# Altium PCB ts-50s-digi-interface.PcbDoc
Units mm, origin at the board's own origin, x right, y up, seen from the top; angles counter-clockwise.
Board outline 70.02 x 82.9 mm, 2 copper layers (Top Layer, Bottom Layer); 52 components, 44 nets, 163 pads, 15 vias.
Unrouted connection lines stored in the file: 1.
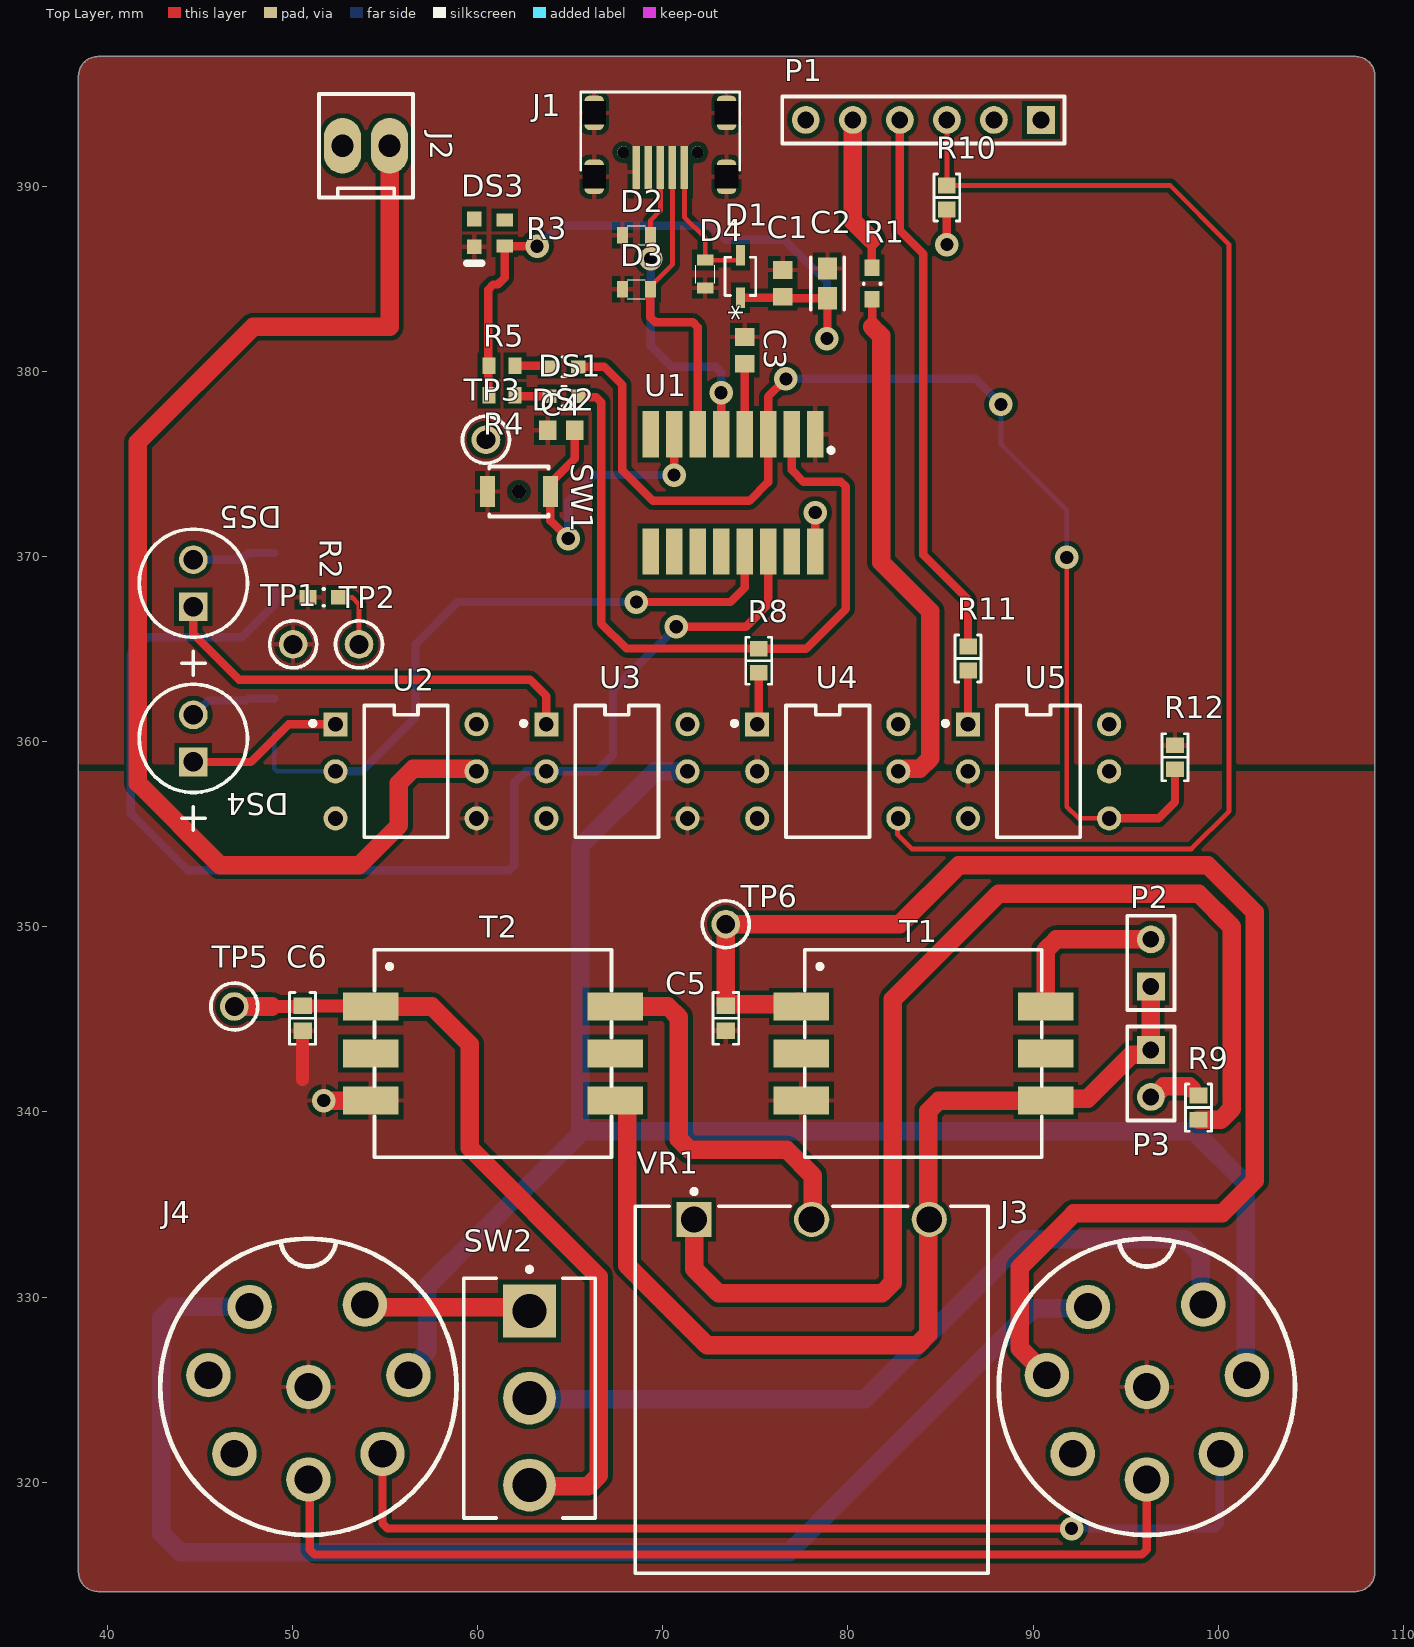
[diagram p0: Top Layer view]
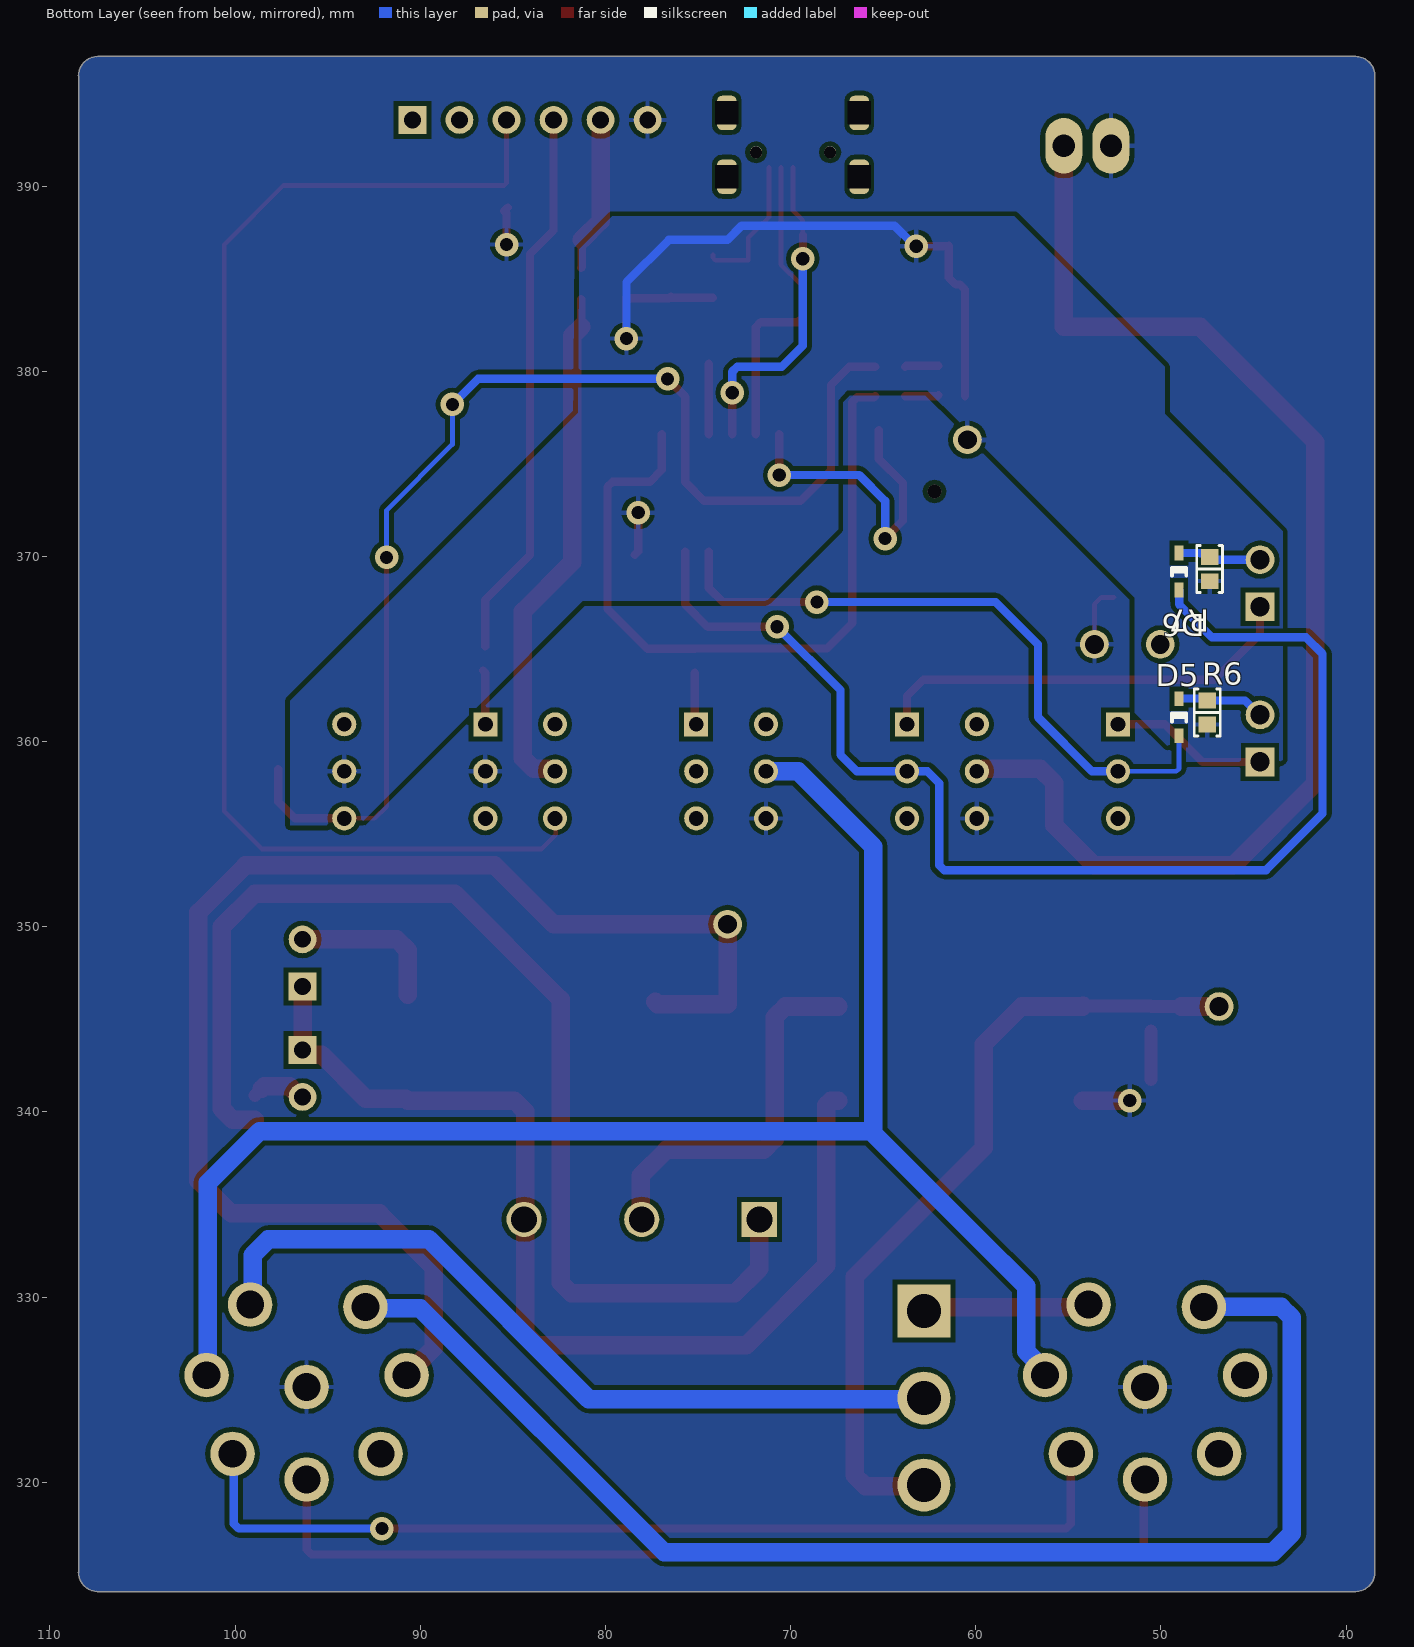
[diagram p1: Bottom Layer view, seen from below]
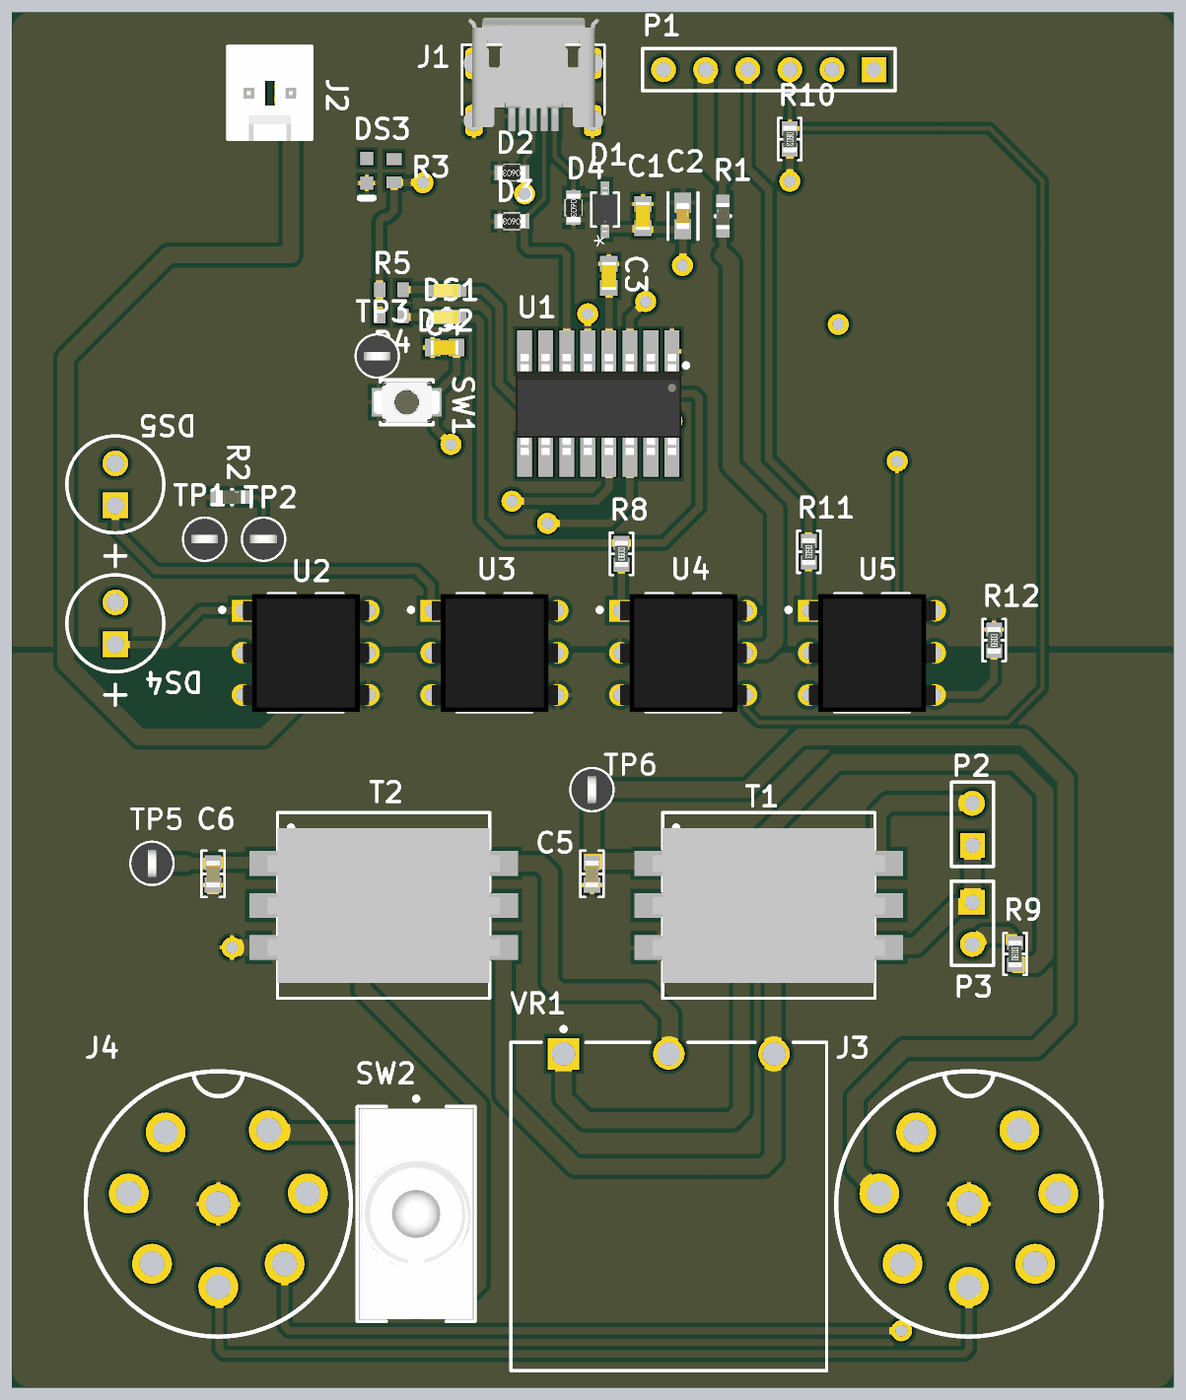
[diagram p2: 3D render of the assembled board from above, using the file's embedded part models]
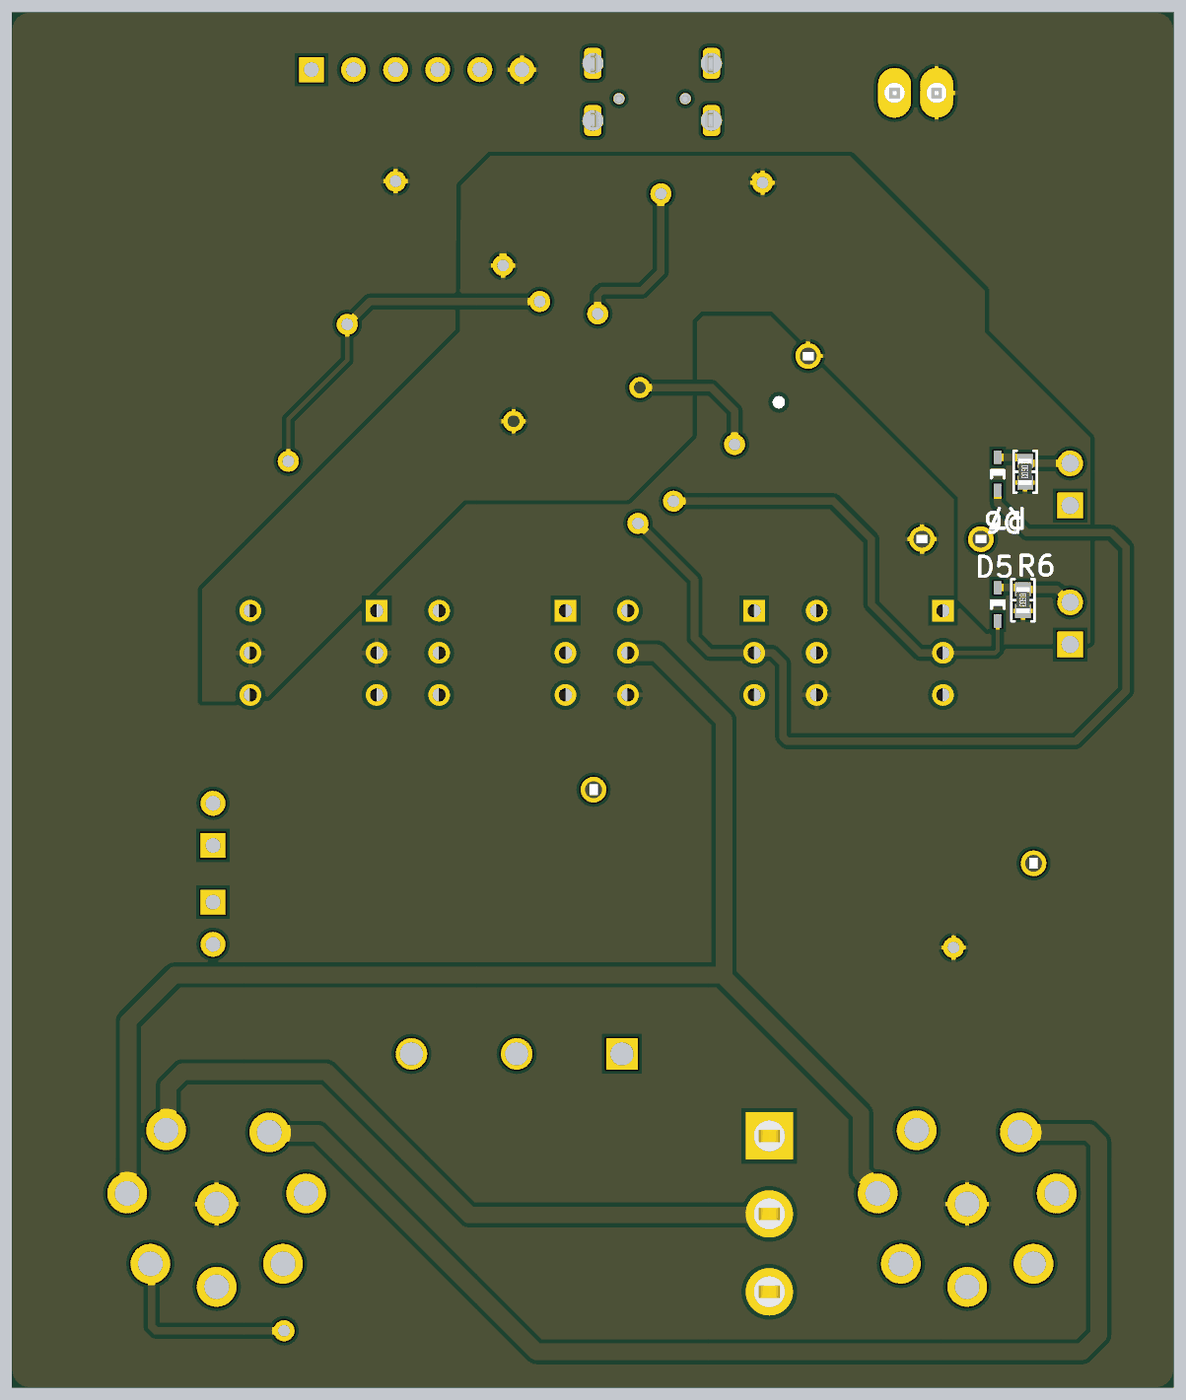
[diagram p3: 3D render of the assembled board from below, using the file's embedded part models]

## Layer stack, top to bottom
Top Solder: solder mask 0.0102, Solder Resist, Dk 3.5
Top Layer: signal copper 0.0356
Dielectric 1: dielectric 0.32, FR-4, Dk 4.8
Bottom Layer: signal copper 0.0356
Bottom Solder: solder mask 0.0102, Solder Resist, Dk 3.5

## Board outline
39.495,314.098 cw(c39.495,315.15) 38.443,315.15 38.443,395.948 cw(c39.495,395.948) 39.495,397 107.41,397 107.41,397.002 cw(c107.41,395.95) 108.462,395.95 108.458,395.95 108.458,315.101 108.462,315.15 cw(c107.41,315.15) 107.41,314.098 107.456,314.099

## Design rules (kind name [scope] priority, off if disabled: settings)
Clearance [All] p1: gap=0.254 ignorepadtopadclearanceinfootprint=TRUE except(0: Arc-Hole Track-Hole SMDPad-Hole THPad-Hole Via-Hole Fill-Hole Poly-Hole Region-Hole Text-Hole)
PolygonConnect [All] p1: connectstyle=Relief reliefconductorwidth=0.254 reliefentries=4 polygonreliefangle="90 Angle" airgapwidth=0.254
RoomDefinition ts-50s-digi-interface [InComponentClass('ts-50s-digi-interface')] p1 off: confinementstyle=ConfineIn formatcopy=TRUE lockcomponents=FALSE outline 38.735,314.579 108.077,314.579 108.077,374.015 38.735,374.015
RoomDefinition Hardware [InComponentClass('Hardware')] p2 off: confinementstyle=ConfineIn formatcopy=TRUE lockcomponents=FALSE outline 166.497,472.694 222.885,472.694 222.885,497.078 166.497,497.078
RoomDefinition CAT-PTT [InComponentClass('CAT-PTT')] p3 off: confinementstyle=ConfineIn formatcopy=TRUE lockcomponents=FALSE outline 39.141,314.706 108.61,314.706 108.61,396.748 39.141,396.748
RoutingVias [All] p1: holewidth=0.711 width=1.27 viastyle="Through Hole" minholewidth=0.711 minwidth=1.27 maxholewidth=0.711 maxwidth=1.27
SolderMaskExpansion [All] p1: expansion=0.102 istentingtop=FALSE
Width [All] p1: maxlimit=1 minlimit=0.254 preferedwidth=0.45
30 further rules are at their usual default settings.

## Classes and differential pairs
component class ts-50s-digi-interface: C5 C6 D5 D6 DS4 DS5 J2 J3 J4 P2 P3 R6 R7 R8 R9 R10 R11 R12 SW2 T1 T2 TP5 TP6 U2 U3 U4 U5 VR1
component class Hardware: Logo1
component class CAT-PTT: C1 C2 C3 C4 D1 D2 D3 D4 DS1 DS2 DS3 J1 P1 R1 R2 R3 R4 R5 SW1 TP1 TP2 TP3 U1

## Components (designator, comment, footprint, x,y, rotation, side; value= is the part's Value field where it differs from the comment)
C1 "100nF" CAPC1608X90X35ML10T15 76.479,384.745 r270 top
C2 "10uF" FP-GRM188-0_1-e0_2_0_55-IPC_A 78.892,384.745 r90 top
C3 "100nF" CAPC1608X90X35ML10T15 74.422,381.127 r90 top
C4 "100nF" CAPC1608X90X35ML10T15 64.516,376.809 r0 top
C5 "100pF" "CAP 0603_1608" 73.406,345.056 r90 top
C6 "100pF" "CAP 0603_1608" 50.546,345.056 r90 top
D1 "BAT760-7" SOD323_DIO 74.193,385.126 r90 top
D2 "ESD Diode" 0603ESDA-05N 68.58,387.35 r180 top
D3 "ESD Diode" 0603ESDA-05N 68.58,384.429 r180 top
D4 "ESD Diode" 0603ESDA-05N 72.288,385.253 r270 top
D5 "1N4148WT" FAIR-SOD-523F-2_V 49.022,361.315 r270 bottom
D6 "1N4148WT" FAIR-SOD-523F-2_V 49.022,369.189 r270 bottom
DS1 "TX" LED_19-217/GHC-YR1S2/3T_EVE 64.662,378.654 r180 top
DS2 "RX" LED_19-217/GHC-YR1S2/3T_EVE 64.662,380.236 r180 top
DS3 "PWR" EVRL-0603-2_V 59.817,387.477 r270 top
DS4 "CW" AVAG-HLMP-3301-2 44.651,358.902 r90 top
DS5 "PTT" AVAG-HLMP-3301-2 44.651,367.284 r90 top
J1 "U254-051N-4BH806" CONN_10103594-0001LF_AMP 73.444,395.104 r180 top
J2 "CW Key" "MOLEX KK 0022272021" 53.975,392.176 r0 top
J3 "To TS50 Front Panel. (GX-8 Female)" GX-8 96.139,325.149 r0 top
J4 "Mic Input. (GX-8 Male)" GX-8 50.863,325.149 r0 top
Logo1 "4S6TMP Logo" "4S6TMP Logo" 176.276,484.378 r0 top
P1 "To CN6" HDR1X6 90.424,393.573 r180 top
P2 "Line In" HDR1X2 96.36,346.778 r90 top
P3 "Line Out" HDR1X2 96.36,343.349 r270 top
R1 "0Ω" FP-RC0603-MFG 81.305,384.735 r90 top
R2 "0Ω" FP-RC0603-MFG 51.689,367.792 r0 top
R3 "2kR" RESC1608X55X25NL10T15 61.468,387.477 r270 top
R4 "2kR" RESC1608X55X25NL10T15 61.31,378.712 r180 top
R5 "2kR" RESC1608X55X25NL10T15 61.31,380.294 r180 top
R6 "330 Ohms" "RES 0603_1608" 47.498,361.569 r270 bottom
R7 "330 Ohms" "RES 0603_1608" 47.371,369.316 r270 bottom
R8 "330 Ohms" "RES 0603_1608" 75.184,364.363 r90 top
R9 "1 kOhms" "RES 0603_1608" 98.933,340.233 r90 top
R10 "330 Ohms" "RES 0603_1608" 85.344,389.382 r270 top
R11 "330 Ohms" "RES 0603_1608" 86.487,364.49 r270 top
R12 "330 Ohms" "RES 0603_1608" 97.663,359.156 r90 top
SW1 "RST" FP-B3U-1000P-B-MFG 62.23,373.507 r0 top
SW2 "Voice <--> Digital, CW" FP-A101SDCQ04-MFG 62.801,324.548 r0 top
T1 "SM-LP-5001" SM-LP-5001 84.074,343.154 r0 top
T2 "SM-LP-5001" SM-LP-5001 60.833,343.154 r0 top
TP1 "5001" KSTN-5001 50.038,365.252 r90 top
TP2 "5001" KSTN-5001 53.594,365.252 r90 top
TP3 "5001" KSTN-5001 60.452,376.301 r90 top
TP5 "5001" KSTN-5001 46.863,345.694 r0 top
TP6 "5001" KSTN-5001 73.406,350.139 r0 top
U1 "CH340B" SOIC-16 76.327,373.38 r270 top
U2 "PTT" Vishay_4N35_0 56.134,358.394 r0 top
U3 "PTT" Vishay_4N35_0 67.522,358.394 r0 top
U4 "CAT-Tx" Vishay_4N35_0 78.909,358.394 r0 top
U5 "CAT-Rx" Vishay_4N35_0 90.297,358.394 r0 top
VR1 "3852A-282-103AL" BOUR-3852A-282-103AL-3_V 78.041,334.2 r0 top

## Footprints (in the part's own frame and the unit in brackets; to place one, negate y for a bottom-side part, rotate by r counter-clockwise, add the part's x,y. Pads: shape width x height; smd on the part's side, far side on the other; paste and mask are expansions set on the pad)
"4S6TMP Logo" [mm] "4S6TMP Logo Silk"
  silkscreen extent -8.44,-8.27 8.16,8.33
0603ESDA-05N [mm] "0603 Diode Footprint"
  rect 0.6x0.9 smd mask+0.01: 1(-0.75,0) 2(0.75,0)
  silkscreen extent -0.48,-0.51 0.51,0.51, body extent -0.82,-0.4 0.88,0.4, height 0.56
AVAG-HLMP-3301-2 [mm] "THD, 2-Leads, Body Dia 5.85mm"
  rect 1.55x1.55 hole 1.05: 1(0,0)
  round 1.55 hole 1.05: 2(2.54,0)
  silkscreen extent -3.68,-2.92 4.19,2.92
BOUR-3852A-282-103AL-3_V [mm] "TH, 3-Leads, Body 19.81x19.05mm, Pitch 6.35mm"
  rect 1.9x1.9 hole 1.4: 1(-6.35,0)
  round 1.9 hole 1.4: 2(0,0) 3(6.35,0)
  silkscreen extent -9.53,-19.11 9.53,1.62, body extent -9.52,-19.11 9.52,0.7, height 19.05
"CAP 0603_1608" [mm] "Chip Capacitor, 2-Leads, Body 1.60x0.80mm, IPC Medium Density"
  rect 0.9x1 smd: 1(-0.675,0) 2(0.675,0)
  silkscreen extent -1.4,-0.7 1.4,0.7, body extent -0.8,-0.41 0.8,0.41, height 0.82
CAPC1608X90X35ML10T15 [mm] "Chip Capacitor, 2-Leads, Body 1.7x0.9mm, IPC Low Density"
  rect 0.95x1.05 smd: 1(-0.725,0) 2(0.725,0)
  body extent -0.85,-0.45 0.85,0.45, height 0.9
CONN_10103594-0001LF_AMP [mm]
  rect 0.406x2.3 smd paste+0 mask+0: 1(2.275,4.1) 2(2.921,4.1) 3(3.571,4.1) 4(4.221,4.1) 5(4.875,4.1)
  rrect50% 1.05x1.85 hole 1.25 square: 6(7.15,4.6) 7(7.15,1.15) 8(0,1.15) 9(0,4.6)
  round 0.65 hole 0.65: *(1.575,3.28) *(5.575,3.28)
  silkscreen extent -0.71,0.03 7.87,4.25, body extent -0.44,-1.6 7.56,5, height 2.68
EVRL-0603-2_V [mm] "SMD, 2-Leads, Body 1.6x0.8mm"
  rect 0.8x0.8 smd: 1(-0.75,0) 2(0.75,0)
  silkscreen extent 1.65,-0.4 1.65,0.4, body extent -0.8,-0.4 0.8,0.4, height 0.5
FAIR-SOD-523F-2_V [mm] "SMD, 2-Leads, Body 1.2x0.8mm, Height 0.7mm"
  rect 0.8x0.5 smd: 1(-1,0) 2(1,0)
  silkscreen extent -0.2,-0.38 0.24,0.38, body extent -0.6,-0.4 0.6,0.4, height 0.71
FP-A101SDCQ04-MFG [mil]
  rect 112.37x112.37 hole 73 paste-39370.1 mask+0: 1(0,185)
  round 112.37 hole 73 paste-39370.1 mask+0: 2(0,0) 3(0,-185)
  silkscreen extent -140,-255 140,279, body extent -144,-259 144,259, height 10
FP-B3U-1000P-B-MFG [mm]
  rect 0.8x1.7 smd paste+0 mask+0: 1(-1.7,0) 2(1.7,0)
  round 0.75 hole 0.75 unplated paste-1000 mask+0: ""(0,0)
  silkscreen extent -1.6,-1.35 1.6,1.35, body extent -2.2,-1.45 2.2,1.45, height 0.25
FP-GRM188-0_1-e0_2_0_55-IPC_A [mm]
  rect 1.208x1.012 smd paste+0 mask+0: 1(-0.802,0) 2(0.802,0)
  silkscreen extent -1.41,-0.91 1.41,0.91, body extent -1.91,-1.01 1.91,1.01, height 0.25
FP-RC0603-MFG [mm]
  rect 0.9x0.8 smd paste+0 mask+0: 1(-0.85,0) 2(0.85,0)
  silkscreen extent -0.03,-0.45 0.03,0.45, body extent -1.4,-0.55 1.4,0.55, height 0.25
GX-8 [mm] "8 Position Circular Connector Receptacle, Male Pins Solder"
  round 2.4 hole 1.5: 1(3.048,4.445) 2(5.4,0.635) 3(4,-3.61) 4(0,-5) 5(-4,-3.61) 6(-5.4,0.635) 7(-3.175,4.318) 8(0,0)
  silkscreen extent -8,-8 8,8
HDR1X2 [mm] "Connector; Header; 2 Position"
  rect 1.5x1.5 hole 0.9: 1(0,0)
  round 1.5 hole 0.9: 2(2.54,0)
  silkscreen extent -1.27,-1.27 3.81,1.27
HDR1X6 [mm] "Connector; Header; 6 Position"
  rect 1.5x1.5 hole 0.9: 1(0,0)
  round 1.5 hole 0.9: 2(2.54,0) 3(5.08,0) 4(7.62,0) 5(10.16,0) 6(12.7,0)
  silkscreen extent -1.27,-1.27 13.97,1.27
KSTN-5001 [mm] "Test Point, Through Hole, Dia 2.54mm"
  round 1.55 hole 1.016: 1(0,0)
  silkscreen extent -1.27,-1.27 1.27,1.27, body extent -1.25,-1.25 1.25,1.25, height 4.62
LED_19-217/GHC-YR1S2/3T_EVE [mil]
  rect 30x28 smd paste+0 mask+0: 1(-30.5,0) 2(30.5,0)
  silkscreen extent -4,-21 4,21, body extent -31,-16 31,16, height 18
"MOLEX KK 0022272021" [mm]
  oval 2x3 hole 1.2: 1(-1.27,0) 2(1.27,0)
  silkscreen extent -2.54,-2.79 2.54,2.79, body extent -2.54,-2.9 2.54,2.9, height 11.7
"RES 0603_1608" [mm] "Chip Resistor, 2-Leads, Body 1.60x0.80mm, IPC Medium Density"
  rect 0.85x0.95 smd: 1(-0.65,0) 2(0.65,0)
  silkscreen extent -1.27,-0.7 1.27,0.7, body extent -0.8,-0.4 0.8,0.4, height 0.45
RESC1608X55X25NL10T15 [mm] "Chip Resistor, 2-Leads, Body 1.60x0.80mm, IPC Medium Density"
  rect 0.7x0.9 smd: 1(-0.7,0) 2(0.7,0)
  body extent -0.85,-0.45 0.85,0.45, height 0.55
SM-LP-5001 [mm]
  rect 3x1.5 smd paste+0 mask+0: 1(-6.6,2.54) 2(-6.6,0) 3(-6.6,-2.54) 4(6.6,-2.54) 5(6.6,0) 6(6.6,2.54)
  silkscreen extent -6.4,-5.6 6.4,5.6, body extent -7,-4.67 7,4.68, height 7.38
SOD323_DIO [mm]
  rect 1.111x0.501 smd paste+0 mask+0: 1(-1.15,0) 2(1.15,0)
  silkscreen extent -1.03,-0.83 1.03,0.83, body extent -1.35,-0.7 1.35,0.7, height 0.81
SOIC-16 [mm]
  rect 2.5x0.9 smd: 1(-3.213,1.905) 2(-3.213,0.635) 3(-3.213,-0.635) 4(-3.213,-1.905) 5(-3.213,-3.175) 6(-3.213,-4.445) 7(-3.213,-5.715) 8(-3.213,-6.985) 9(3.113,-6.985) 10(3.113,-5.715) 11(3.113,-4.445) 12(3.113,-3.175) 13(3.113,-1.905) 14(3.113,-0.635) 15(3.113,0.635) 16(3.113,1.905)
  silkscreen extent -2.47,2.63 -2.23,2.88, body extent -3.03,-7.54 3.05,2.46, height 1.75
Vishay_4N35_0 [mm]
  rect 1.3x1.3 hole 0.8 paste-1000 mask+0: 1(-3.81,2.54)
  round 1.3 hole 0.8 paste-1000 mask+0: 2(-3.81,0) 3(-3.81,-2.54) 4(3.81,-2.54) 5(3.81,0) 6(3.81,2.54)
  silkscreen extent -5.16,-3.56 2.25,3.56, body extent -4.56,-3.81 4.56,3.81, height 0.25

## Part data
C1 C3 C4: library part CMP-2006-02375-5, "Chip Capacitor, 100 nF, +/- 10%, 50 V, -55 to 125 degC, 0603 (1608 Metric), RoHS, Tape and Reel", Case Code (Imperial)=0603, Case Code (Metric)=1608, Dielectric=X7R, Manufacturer=Murata, Manufacturer Part Number=GCM188R71H104KA57D, Max Operating Temperature="125 degC", Min Operating Temperature="-55 degC", Package Quantity=4000, Ratings=AEC-Q200, Supplier Part Number 1=490-4779-1-ND, Tolerance=10%, Voltage=50V, Voltage Rating="50 V", Capacitance=100nF, Case/Package=0603, Category="Ceramic Capacitors", ComponentLink1Description="Manufacturer URL", ComponentLink1URL=http://www.murata.com/, ComponentLink2Description=Datasheet, ComponentLink2URL=http://psearch.en.murata.com/capacitor/product/GCM188R71H104KA57%23.pdf, ComponentLink3Description=https://datasheet.ciiva.com/16624/product-16624562.pdf?src-supplier=Avnet+Europe, ComponentLink3URL=https://datasheet.ciiva.com/16624/product-16624562.pdf?src-supplier=Avnet+Europe, ComponentLink4Description=https://datasheet.ciiva.com/133/product-133574.pdf?src-supplier=Digi-Key, ComponentLink4URL=https://datasheet.ciiva.com/133/product-133574.pdf?src-supplier=Digi-Key, ComponentLink5Description=https://datasheet.ciiva.com/133/product-133575.pdf?src-supplier=Digi-Key, ComponentLink5URL=https://datasheet.ciiva.com/133/product-133575.pdf?src-supplier=Digi-Key, ComponentLink6Description=https://datasheet.ciiva.com/18183/getdatasheetpartid-98693-18183626.pdf?src-supplier=Verical, ComponentLink6URL=https://datasheet.ciiva.com/18183/getdatasheetpartid-98693-18183626.pdf?src-supplier=Verical, ComponentLink7Description=https://datasheet.ciiva.com/11786/0900766b80ef92d0-11786863.pdf?src-supplier=RSComponents, ComponentLink7URL=https://datasheet.ciiva.com/11786/0900766b80ef92d0-11786863.pdf?src-supplier=RSComponents, ComponentLink8Description=https://datasheet.ciiva.com/133/product-133573.pdf?src-supplier=Digi-Key, ComponentLink8URL=https://datasheet.ciiva.com/133/product-133573.pdf?src-supplier=Digi-Key, ComponentLink9Description=https://datasheet.ciiva.com/2989/product-2989242.pdf?src-supplier=Avnet, ComponentLink9URL=https://datasheet.ciiva.com/2989/product-2989242.pdf?src-supplier=Avnet, ComponentLink10Description=https://datasheet.ciiva.com/16497/product-16497247.pdf?src-supplier=Future+Electronics, ComponentLink10URL=https://datasheet.ciiva.com/16497/product-16497247.pdf?src-supplier=Future+Electronics, Construction=Flat, DatasheetVersion=07/2016, Depth=0.8mm, Height="0.8 mm", Lead Free="Lead Free", Length="1.6 mm", Mount="Surface Mount", Mounting Technology="Surface Mount", PackageDescription="2-Pin Surface Mount Device, Body 1.6 x 0.8 mm", PackageReference=0603, Packaging="Tape and Reel", Pricing 1="1=0.11000, 10=0.07900, 50=0.04300, 100=0.03510, 500=0.02510, 1000=0.01972 (USD)", Radiation Hardening=No, REACH SVHC="No SVHC", RoHS=Yes, RoHS Compliant=Yes, RoHSCompliant=true, Series=GCM, Stock 1=3146580, Supplier 1=Digi-Key, Termination=SMD/SMT, Thickness=0.035inch, Voltage Rating (DC)=50V, Width=0.031inch
C2: library part CMP-2006-02792-2, "Chip Multilayer Ceramic Capacitors for General Purpose, 0603, 10uF, X5R, 15%, 20%, 6.3V", Case Code (Imperial)=0603, Case Code (Metric)=1608, Dielectric=X5R, Max Operating Temperature=85°C, Min Operating Temperature=-55°C, Package Quantity=4000, Tolerance=20%, Voltage=6.3V, Capacitance=10uF, Case/Package=0603, Depth=0.8mm, Height=0.8mm, Lead Free="Lead Free", Length=1.6mm, Material=Ceramic, Mount="Surface Mount", Packaging="Tape and Reel", Radiation Hardening=No, REACH SVHC="No SVHC", Termination=SMD/SMT, Thickness=0.035inch, Voltage Rating=6.3V, Voltage Rating (DC)=6.3V, Width=0.031inch
C5 C6: library part 500R14N101JV4T, "CAP CER 100PF 50V C0G/NP0 0603", Device Package="0603 (1608 Metric)", Manufacturer="Johanson Dielectrics Inc.", Operating Temperature="-55°C ~ 125°C", Supplier Part Number 1=709-1147-1-ND, Temperature Coefficient="C0G, NP0", Tolerance=±5%, Voltage - Rated=50V, Applications="General Purpose", Capacitance=100pF, ComponentLink1Description=Datasheet, ComponentLink1URL=https://www.johansondielectrics.com/downloads/catalog/johanson-dielectrics-product-catalog.pdf, ComponentLink2Description="DigiKey Link", ComponentLink2URL=http://digikey.com/product-detail/en/johanson-dielectrics-inc/500R14N101JV4T/709-1147-1-ND/1859479, LastUpdated="02/09/2020 01:03:11", Lifecycle Status=Active, Minimum Order=1, Mounting Type="Surface Mount, MLCC", Package / Case="0603 (1608 Metric)", Packaging=TapeAndReel, Part Number=500R14N101JV4T, Part Status=Active, PartId=15143, Price=0.08, Series=-, Size / Dimension="0.063\" L x 0.032\" W (1.60mm x 0.81mm)", Supplier 1=DigiKey, Thickness (Max)="0.035\" (0.89mm)"
D1: "30V 1A 550mV @ 1A SOD-323 Schottky Barrier Diodes (SBD) RoHS", LCSC PN=C124187, Supplier Part Number 1=8129394, Manufacturer Product Number=BAT760-7, Supplier 1="Future Electronics"
D2 D3 D4: library part 0603ESDA-05N, "Bidirectional - 50V - 5V 0603 ESD Protection Devices ROHS"
D5 D6: library part CMP-0881-00001-1, "High Conductance Fast Switching Diode, 75 V, -55 to 150 degC, 2-Pin SOD523F, RoHS", Manufacturer="Fairchild Semiconductor", Temperature Range="-55 to 150 degC", BVR (IR="5 uA)=75 V Min.", CO="4 pF Max.", ComponentLink1Description="Manufacturer URL", ComponentLink1URL=http://www.fairchildsemi.com/, ComponentLink2Description=Datasheet, ComponentLink2URL=http://www.fairchildsemi.com/ds/1N/1N4148WT.pdf, DatasheetVersion="Rev. A2", IR (VR="75 V)=5 uA Max.", Mounting Technology="Surface Mount", PackageDescription="2-Pin Surface Mount Device, Body 1.2 x 0.8 mm, Height 0.7 mm", PackageReference=SOD-523F-2, PartNumber=1N4148WT, RoHS=TRUE, VF="1 V Max."
DS1: library part 19-217/GHC-YR1S2/3T, "No Description Available", Colour=Green, Supplier Part Number 1=19-217/GHC-YR1S2/3T-ND, Built_By=EMA_Cory, Copyright="Copyright (C) 2018 Accelerated Designs. All rights reserved", Datasheet=https://media.digikey.com/pdf/Data%20Sheets/Everlight%20PDFs/19-217,GHC-YR1S2,3T.pdf, Manufacturer_Part_Number=19-217/GHC-YR1S2/3T, RefDes=RefDes, SourceLibrary=Add_to_database_2021-02-25, Supplier 1=Digi-Key, Type=DEV, Vendor="Everlight Electronics"
DS2: library part 19-217/Y5C-AP1Q2/3T, "Yellow 590nm LED Indication - Discrete 2V 0603 (1608 Metric)", Colour=Yellow, Supplier Part Number 1=19-217/Y5C-AP1Q2/3T-ND, Manufacturer_Part_Number=19-217/Y5C-AP1Q2/3T, RefDes=RefDes, SourceLibrary=Add_to_database_2021-02-25, Supplier 1=Digi-Key, Type=DEV, Vendor="Everlight Electronics"
DS3: library part CMP-2100-03578-1, "Chip LED, Red, 5 V, 25 mA, -40 to 85 degC, 2-Pin SMD (0603), RoHS, Tape and Reel", Case/Package=0603, Colour=Red, Forward Voltage=2.2V, Manufacturer="Everlight Electronics", Package Description="2-Pin Surface Mount Device, Body 1.6 x 0.8 mm", Datasheet URL=https://datasheet.ciiva.com/4688/el-19-217-r6c-al1m2vy-3tpdf-187026-4688713.pdf, Datasheet Version="Rev. 1, 01/2005", Lead Free=LeadFree, Lens Style=Clear, Manufacturer URL=http://www.everlight.com/, Package Reference=0603, RoHSCompliant=false
DS4 DS5: library part CMP-2000-06411-1, "T-1 3/4 (5 mm) Diffused LED Lamp, 1.9 V, -40 to 100 degC, 2-Pin THD, RoHS, Bulk", Emitting Color=Red, Forward Current=25mA, Forward Voltage=2.4V, Manufacturer=Avago, Operating Temp Range=-40Cto100C, Operating Temperature Classification=Industrial, Package Description="2-Pin Through Hole LED, Dia 5.85 mm", Package Reference=HLMP-3301, Package Type=T-13/4, Power Dissipation=85W, Reverse Voltage=5V, Test Current (It)=10mA, Chip Material=GaP, Datasheet URL=http://www.avagotech.com/docs/AV02-1558EN, Datasheet Version=03/2015, DELETED=Compliant, Dominant Wave Length=626nm, High Brightness=No, Lens Dimensions=5.08x5.08x8.3mm, Lens Type=ColoredDiffused, Lum Intensity=5.4mcd, Luminous Intensity=5.4mcd, Main Category=StandardLED, Manufacturer URL=http://www.avagotech.com/, Mounting=ThroughHole, Mounting Technology=ThroughHole, Number of  Elements=1, Packaging=TapeandReel, Peak Wavelength=635nm, Pin Count=2, Product Depth (mm)=6.1mm, Product Height (mm)=9.19mm, Product Length (mm)=6.1mm, Rad Hardened=No, Shape Type=Circular, Type=Uni-Color, Viewing Angle=60deg
J1: "USB - Micro B Female USB 2 5 SMD USB Connectors RoHS", Datasheet=https://datasheet.lcsc.com/lcsc/2107141638_XKB-Connectivity-U254-051N-4BH806_C319170.pdf, Manufacturer_Part_Number=U254-051N-4BH806, RefDes=RefDes, Type=DEV, Vendor="XKB Connectivity"
J2: library part 0022272021, "CONN HEADER VERT 2POS 2.54MM", Insulation Color=Natural, Manufacturer=Molex, Material Flammability Rating="UL94 V-0", Supplier Part Number 1=WM4111-ND, ComponentLink1Description=Datasheet, ComponentLink1URL=https://www.molex.com/pdm_docs/sd/022272021_sd.pdf, ComponentLink2Description="DigiKey Link", ComponentLink2URL=http://digikey.com/product-detail/en/molex/0022272021/WM4111-ND/1130577, Connector Type=Header, Contact Finish - Mating=Tin, Contact Finish - Post=Tin, Contact Finish Thickness - Mating="100.0µin (2.54µm)", Contact Length - Mating="0.295\" (7.49mm)", Contact Length - Post="0.140\" (3.56mm)", Contact Material=Brass, Contact Shape=Square, Contact Type="Male Pin", Fastening Type="Friction Lock", Insulation Height="0.461\" (11.70mm)", Insulation Material="Polyamide (PA), Nylon", LastUpdated="12/01/2020 23:51:43", Lifecycle Status=Active, Minimum Order=1, Mounting Type="Through Hole", Number of Positions=2, Number of Positions Loaded=All, Number of Rows=1, Overall Contact Length="0.560\" (14.22mm)", Packaging=Bulk, Part Number=0022272021, Part Status=Active, PartId=76, Pitch - Mating="0.100\" (2.54mm)", Price=0.27, Series="KK 6410", Shrouding="Shrouded - 1 Wall", Style="Board to Cable/Wire", Supplier 1=DigiKey, Termination=Solder
J3 J4: library part GX-8, "8 Position Circular Connector Receptacle, Male Pins Solder", Manufacturer="Amphenol Tuchel Industrial", Manufacturer Product Number=C09131W0081002U, ComponentLink1Description="Manufacturer Link", ComponentLink1URL=https://www.digikey.com/en/products/detail/amphenol-tuchel-industrial/C09131W0081002U/1036183, ComponentLink2Description=Datasheet, ComponentLink2URL=http://www.amphenol-sine.com/pdf/catalog/C091.pdf
Logo1: library part 4S6TMP-logo, "Codeverto Logo"
P1: library part "Header 6", "Header, 6-Pin", LatestRevisionDate=17-Jul-2002, LatestRevisionNote="Re-released for DXP Platform.", Publisher="Altium Limited"
P2 P3: library part "Header 2", "3.5mm Mono", LatestRevisionDate=17-Jul-2002, LatestRevisionNote="Re-released for DXP Platform.", Publisher="Altium Limited"
R1 R2: library part CMP-2000-06925-2, "RES SMD 0 OHM JUMPER 1/10W 0603", Manufacturer=Yageo, Manufacturer Part Number=RC0603FR-070RL, Package=RC0603, Power Rating=0.1W, Temperature="-55°C to +155°C", Temperature Range High=+155°C, Temperature Range Low=-55°C, Tolerance=1%, Voltage Rating=75V, Automotive=No, Category=Res, ComponentLink2Description=Datasheet, ComponentLink2URL=http://www.yageo.com/documents/recent/PYu-RC_Group_51_RoHS_L_10.pdf, Composition="Thick Film", Device Class L1="Passive Components", Device Class L2=Resistors, Device Class L3="Chip SMD Resistors", Digikey Description="RES SMD 0 OHM JUMPER 1/10W 0603", Footprint Url=http://www.yageo.com/exep/pages/download/literatures/PYu-R_Mount_10.pdf, Height=0.55mm, Ipc Land Pattern Name=RESC16080X45, Lead Free=Yes, Mouser Description="RC Series 0603 0.1 W 0 O Jumper Surface Mount Thick Film Chip Resistor", Octopart=https://octopart.com/rc0603fr-070rl-yageo-1180803, Resistance=0Ω, RoHS=TRUE, Series=RC_L
R3 R4 R5: library part CMP-2000-04259-1, Case Code (Imperial)=0603, Case Code (Metric)=1608, Manufacturer=Yageo, Manufacturer Part Number=RC0603JR-072KL, Max Operating Temperature=155°C, Max Power Dissipation=100mW, Min Operating Temperature=-55°C, Resistance Tolerance=5%, Resistor Type="Thick Film", Supplier Part Number 1=311-2.0KGRCT-ND, Temperature Coefficient=100ppm/°C, Voltage Rating=50V, Case/Package=0603, Category="Chip SMD Resistors", ComponentLink1Description=https://datasheet.ciiva.com/46395/443971-46395143.pdf?src-supplier=Element14, ComponentLink1URL=https://datasheet.ciiva.com/46395/443971-46395143.pdf?src-supplier=Element14, Construction=Rectangular, Depth=0.8mm, Features="Moisture Resistant", Lead Free="Lead Free", Length=1.6mm, Military Standard=Not, Number of Pins=2, Number of Terminations=2, Packaging="Tape and Reel", Part Number=RC0603JR-072KL, Power Rating=100mW, Pricing 1="1=0.10000, 10=0.02000, 100=0.00800, 1000=0.00360, 2500=0.00312 (USD)", REACH SVHC="No SVHC", Resistance=2kR, RoHS=Yes, RoHS Compliant=Yes, Series=RC, Size Code=0603, Stock 1=288847, Supplier 1=Digi-Key, Termination=SMD/SMT, Tolerance=5%, Voltage Rating (DC)=50V
R6 R7 R8 R10 R11 R12: library part AC0603FR-07330RL, "RES SMD 330 OHM 1% 1/10W 0603", Device Package="0603 (1608 Metric)", Manufacturer=Yageo, Operating Temperature="-55°C ~ 155°C", Power (Watts)="0.1W, 1/10W", Ratings=AEC-Q200, Supplier Device Package=0603, Supplier Part Number 1=YAG3595CT-ND, Temperature Coefficient=±100ppm/°C, Tolerance=±1%, ComponentLink1Description=Datasheet, ComponentLink1URL=https://www.yageo.com/upload/media/product/productsearch/datasheet/rchip/PYu-AC_51_RoHS_L_7.pdf, ComponentLink2Description="DigiKey Link", ComponentLink2URL=http://digikey.com/product-detail/en/yageo/AC0603FR-07330RL/YAG3595CT-ND/6006444, Composition="Thick Film", Features="Automotive AEC-Q200, Moisture Resistant", Height - Seated (Max)="0.022\" (0.55mm)", LastUpdated="02/09/2020 01:09:46", Lifecycle Status=Active, Minimum Order=1, Number of Terminations=2, Package / Case="0603 (1608 Metric)", Packaging=CutTape, Part Number=AC0603FR-07330RL, Part Status=Active, PartId=22572, Price=0.10, Resistance="330 Ohms", Series=AC, Size / Dimension="0.063\" L x 0.031\" W (1.60mm x 0.80mm)", Supplier 1=DigiKey
R9: library part AT0603FRE071KL, "RES SMD 1K OHM 1% 1/10W 0603", Device Package="0603 (1608 Metric)", Manufacturer=Yageo, Operating Temperature="-55°C ~ 155°C", Power (Watts)="0.1W, 1/10W", Ratings=AEC-Q200, Supplier Device Package=0603, Supplier Part Number 1=YAG2125CT-ND, Temperature Coefficient=±50ppm/°C, Tolerance=±1%, ComponentLink1Description=Datasheet, ComponentLink1URL=http://www.yageo.com/documents/recent/PYu-AT_51_RoHS_L_5.pdf, ComponentLink2Description="DigiKey Link", ComponentLink2URL=http://digikey.com/product-detail/en/yageo/AT0603FRE071KL/YAG2125CT-ND/5139573, Composition="Thin Film", Features="Anti-Sulfur, Automotive AEC-Q200, Moisture Resistant", Height - Seated (Max)="0.022\" (0.55mm)", LastUpdated="02/09/2020 01:10:12", Lifecycle Status=Active, Minimum Order=1, Number of Terminations=2, Package / Case="0603 (1608 Metric)", Packaging=TapeAndReel, Part Number=AT0603FRE071KL, Part Status=Active, PartId=11376, Price=0.02, Resistance="1 kOhms", Series=AT, Size / Dimension="0.063\" L x 0.031\" W (1.60mm x 0.80mm)", Supplier 1=DigiKey
SW1: library part CMP-08834-000005-1, "SWITCH TACTILE SPST-NO 0.05A 12V", Ambient Temperature Range High=+70°C, Ambient Temperature Range Low=-25°C, Contact Current Rating=50mA, Contact Resistance=100mΩ, Manufacturer=Omron, Manufacturer Part Number=B3U-1000P-B, Operating Force=1.5N, Package=0, Temperature="-25°C to +70°C", Voltage Rating Dc=12V, Automotive=No, Category=Switch, ComponentLink2Description=Datasheet, ComponentLink2URL=https://omronfs.omron.com/en_US/ecb/products/pdf/en-b3u.pdf, Device Class L1=Electromechanical, Device Class L2=Switches, Device Class L3="Tactile Switches", Digikey Description="SWITCH TACTILE SPST-NO 0.05A 12V", Electromechanical Life=200000Cycles, Height=1.75mm, Lead Free=Yes, Mount="Surface Mount", Mouser Description="Tactile Switches Top Actuated with boss w/o ground", Octopart=https://octopart.com/b3u-1000p-b-omron-1057356, RoHS=TRUE, Temperature Range High=+70°C, Temperature Range Low=-25°C, Throw Configuration=SPST-NO
SW2: library part CMP-03408-000002-1, "SWITCH TOGGLE SPDT 5A 120V", Case/Package=125, Contact Current Rating=5A, Contact Resistance=10mR, Max Operating Temperature=85°C, Min Operating Temperature=-30°C, Package Quantity=100, Actuator Length=12.19mm, Actuator Material=Phenolic, Contact Material=Copper, Mount=PCB, Series="Gemini A", Termination="Through Hole", Throw Configuration=SPDT
T1 T2: library part CMP-07264-000002-1, "TRANSFORMER LINE MATCHING SMD"
TP1 TP2 TP3 TP5 TP6: library part CMP-2000-05181-1, "Test Point, Black, 1-Pin THD, RoHS, Bulk", Alternate Color="5004K-ND / -TESTPOINTPCMINI.040\"DYELLOW / 5003K-ND / -TESTPOINTPCMINI.040\"DORANGE / 5002K-ND / -TESTPOINTPCMINI.040\"DWHITE / 5000K-ND / -TESTPOINTPCMINI.040\"DRED", Color=Black, Manufacturer=Keystone, Standard Package=100, Catalog Drawings=5000Series, Category=TestandMeasurement, Datasheet URL=https://ciiva.com/datasheet-click-2917627?src=ciiva&sig=bd195616, Datasheet Version="Rev. G, 12/2008", Family=TestPoints, Kits="DKTGRS232C-KIT-ND / -TTLCONVERTER", Manufacturer URL=http://www.keyelco.com/, Material=Base,Nylon46,UL94V-0, Mounting Type="0.040\"(1.02mm)HoleDiameter", Online Catalog=ColorCodedTestPoints, Other Names=5001K, Packaging=Bulk, RoHS Information=RoHSComplianceStatement, Series=THM, Terminal="0.010\"x0.020\"(0.25mmx0.51mm)PhosphorBronzeWire,SilverPlated", Type=PCTestPoint,Miniature
U1: "Transceiver USB 2.0 2Mbps SOP-16_150mil USB ICs RoHS", ComponentLink1Description=LCSC, ComponentLink1URL=https://lcsc.com/product-detail/USB-ICs_WCH-Jiangsu-Qin-Heng-CH340B_C81010.html, Datasheet=https://datasheet.lcsc.com/lcsc/2107141453_WCH-Jiangsu-Qin-Heng-CH340B_C81010.pdf, Manufacturer_Part_Number=CH340B, RefDes=RefDes, Type=DEV, Vendor=WCH
U2 U3 U4 U5: library part IC_Vishay_4N35_eec, "IC OPTOISO 5KV TRANS W/BASE 6DIP", Digikey Part Number=4N35-ND, Manufacturer=Vishay, Mfg Package Ident=4N35, Mouser Part Number=78-4N35, Temperature="-55°C to +100°C", Temperature Range High=+100°C, Temperature Range Low=-55°C, ComponentLink1Description=Upverter, ComponentLink1URL=https://upverter.com/upn/revision/7474c0fadec3a473/, ComponentLink2Description=Datasheet, ComponentLink2URL=https://www.vishay.com/docs/81181/4n35.pdf, Digikey Description="IC OPTOISO 5KV TRANS W/BASE 6DIP", helpURL=https://upverter.com/upn/revision/7474c0fadec3a473/, Ipc Land Pattern Name=DIP762W50P254L712H450Q6, Lead Free=yes, Package=4N35, Part Number=4N35, Price=0.32203113639, RoHS=TRUE, Supplier 1=Digi-Key, Supplier 2=Mouser, Supplier Part Number 1=4N35-ND, Supplier Part Number 2=78-4N35
VR1: library part CMP-2000-05079-1, "Diameter Panel Control, 100 KOhm, +/- 10%, 2 W, -1 to 125 degC, 3-Pin THD, RoHS, Bulk", Manufacturer=Bourns, Power (Watts)=2W, Resistance (Ohms)=100k, Resistive Material=Cermet, Standard Package=45, Temperature Coefficient=±150ppm/degC, Tolerance=±10%, Actuator Diameter="0.250\"(6.35mm)", Actuator Length="0.875\"(22.23mm)", Actuator Type=Slotted, Associated Product="36-8560-ND / -KNOBINSTRUMW/DIALRND.9\"DIA / 36-8555-ND / -KNOBINSTRUMSKIRTEDRND.7\"DIA / 36-8556-ND / -KNOBINSTRUMSKIRTEDRND.9\"DIA / 36-8565-ND / -KNOBINSTRUMDBLBARRND.7\"DIA / 36-8566-ND / -KNOBINSTRUMDBLBARRND.9\"DIA / 36-8568-ND / -KNOBINSTRUMSGLBARRND.7\"DIA / 36-8569-ND / -KNOBINSTRUMSGLBARRND.9\"DIA / 36-8559-ND / -KNOBINSTRUMW/DIALRND.7\"DIA / 226-1006-ND / -KNOBBLKGLOSS.75\"DIA.250\"SHAFT / 226-1007-ND / -KNOBBLKGLOSS.925\"DIA.250\"SHAFT / 226-1011-ND / -KNOBBLKGLOS", Built in Switch=None, Bushing Thread=3/8-32, Catalog Drawings="3852SeriesSide1 /  / 3852SeriesSide2", Category=Potentiometers,VariableResistors, Datasheet URL=https://datasheet.ciiva.com/11831/0900766b80f93b4b-11831016.pdf, Datasheet Version=Sep-14, Family=RotaryPotentiometers,Rheostats, Manufacturer URL=http://www.bourns.com/, Mounting Type=PanelMount, Number of Gangs=1, Number of Turns=1, Online Catalog=3852and3856Series, Other Names=3852A282103AL, Packaging=Bulk, PCN Design/Specification=PBTResinJun/2011, PCN Other=MultipleChanges01/Dec/2012, RoHS Information=3852A-LMaterialDeclaration, Rotation=280deg, Series=3852, Taper=Linear, Termination Style=SolderLug

## Via types
v1: diameter 1.27, hole 0.711, Top Layer to Bottom Layer, 15 vias

## Nets (pads, with @x,y where several pads share a name; then routed paths per layer and width w, separated by ;. In a path a pad name is that pad's centre, name@x,y a point inside that pad or via, vN(x,y) a via of type N, cw(c..) or ccw(c..) an arc to the next point about the centre after c; other vN are vias at no path point)
+5V: C1.2 C2.1 D1.1 R3.2 R4.2 R5.2 R6.2 R7.2 TP3.1 U1.16 U5.5 | length 40.3
  Top Layer w0.45: R4.2@60.579,378.645 60.579,384.419 60.843,384.683 61.087,384.683 61.468,385.064 R3.2 61.49,386.755 v1(63.212,386.755) ; D1.1 76.435,383.976 C1.2 76.556,383.943 C2.1 78.892,381.787 v1(78.867,381.762) ; v1(78.232,372.364) U1.16 U1.16@78.421,370.078
  Bottom Layer w0.45: v1(63.212,386.755) 63.126,386.842 63.373,386.842 64.389,387.858 72.644,387.858 73.406,387.096 76.581,387.096 78.867,384.81 v1(78.867,381.762)
+5V_R: R1.1 U4.5 | length 28.1
  Top Layer w0.45: 81.305,382.397 R1.1
  Top Layer w1: 81.305,382.397 81.788,381.914 81.788,369.697 84.455,367.03 84.455,359.107 83.869,358.521 83.058,358.521 82.989,358.451 82.777,358.451 U4.5
CTS: U1.9
DCD: U1.12
DIGI: C6.2 SW2.3 T2.1 TP5.1 | length 43.9
  Top Layer w0.7: 48.895,345.694 50.509,345.694 C6.2 T2.1@54.196,345.731
  Top Layer w1: TP5.1@46.99,345.567 47.117,345.694 48.895,345.694 ; T2.1@54.196,345.731 T2.1 57.531,345.694 59.563,343.662 59.563,338.074 66.548,331.089 66.548,320.372 65.962,319.786 SW2.3@62.611,319.786
DOWN: J3.3 J4.3 | length 52.6
  Top Layer w0.45: J4.3@54.864,321.204 54.864,317.764 55.128,317.5 v1(92.075,317.5)
  Bottom Layer w0.45: v1(92.075,317.5) 99.812,317.5 100.076,317.764 J3.3@100.076,321.465
DSR: U1.10
DTR: D5.2 U1.13 U2.2 | length 35.7
  Top Layer w0.45: v1(68.58,367.538) 73.66,367.538 74.422,368.3 U1.13
  Bottom Layer w0.254: D5.2@49.022,360.442 49.022,358.543 49.171,358.394 U2.2
  Bottom Layer w0.45: U2.2 53.721,358.394 56.642,361.315 56.642,365.252 58.928,367.538 v1(68.58,367.538)
GND: C1.1 C2.2 C3.2 C4.1 D2.2 D3.2 D4.2 DS3.2 J1.5 J1.6 J1.7 J1.8 J1.9 R2.1 R12.2 SW1.1 TP1.1 U1.1 U4.2
GND_R: C5.1 C6.1 J2.1 J3.8 J4.8 P1.6 R2.2 R10.2 T1.3 T2.3 TP2.1 U2.4 U3.4 U5.2 | length 10.7
  Top Layer w0.254: R2.2 52.547,367.784 53.221,367.784 53.594,367.411 TP2.1
  Top Layer w0.45: R10.2@85.281,388.842 85.471,388.652 85.344,388.525 v1(85.344,386.842)
  Top Layer w0.7: 50.546,341.757 C6.1
  Top Layer w1: v1(51.689,340.614) T2.3
MIC: J3.1 SW2.2 | length 43.2
  Bottom Layer w1: SW2.2@62.611,324.485 80.899,324.485 89.535,333.121 98.201,333.121 99.06,332.262 99.06,329.658 J3.1@99.187,329.531
MIC-GND: J3.7 J4.7 | length 72.4
  Bottom Layer w1: J4.7 43.512,329.467 42.926,328.881 42.926,317.246 43.942,316.23 76.835,316.23 90.009,329.404 J3.7@92.837,329.404
NetC3_1: C3.1 U1.4 | length 3.8
  Top Layer w0.45: U1.4 C3.1
NetD1_2: D1.2 D4.1 J1.1 | length 7.6
  Top Layer w0.254: J1.1 71.169,388.317 72.288,387.198 D4.1 74.069,386.003 74.193,386.126 D1.2
NetD5_1: D5.1 DS4.2 R6.1 | length 4.7
  Bottom Layer w0.45: DS4.2 44.688,361.442 45.465,362.219 R6.1 47.61,362.331 49.006,362.331 D5.1
NetD6_1: D6.1 DS5.2 R7.1 | length 4.5
  Bottom Layer w0.45: DS5.2 47.229,369.824 R7.1 47.571,370.166 47.862,370.166 47.885,370.189 D6.1
NetDS1_2: DS1.2 R4.1 | length 1.8
  Top Layer w0.45: R4.1 62.068,378.654 DS1.2@63.812,378.654
NetDS2_2: DS2.2 R5.1 | length 1.8
  Top Layer w0.45: R5.1 63.754,380.294 DS2.2@63.812,380.236
NetDS3_1: DS3.1 R3.1
NetDS4_1: DS4.1 U2.1 | length 8.5
  Top Layer w0.45: DS4.1 47.752,358.902 49.784,360.934 U2.1
NetDS5_1: DS5.1 U3.1 | length 23.4
  Top Layer w0.45: DS5.1 44.651,365.813 47.117,363.347 62.823,363.347 63.712,362.458 U3.1
NetJ2_2: J2.2 U2.5 | length 68
  Top Layer w1: J2.2 55.245,382.397 47.879,382.397 41.656,376.174 41.656,357.759 46.101,353.314 53.594,353.314 55.753,355.473 55.753,357.759 56.515,358.521 59.605,358.521 59.674,358.451 59.887,358.451 U2.5
NetP1_5: P1.5 R1.2 | length 8.4
  Top Layer w0.45: 81.28,387.096 81.28,385.61 R1.2
  Top Layer w1: P1.5 80.264,388.112 81.28,387.096
NetP2_1: P2.1 P3.1 T1.4 T2.4 VR1.3 | length 56.5
  Top Layer w1: T2.4 67.822,340.614 68.072,340.364 68.072,331.724 72.39,327.406 83.742,327.406 84.328,327.992 84.328,334.2 84.328,340.028 84.914,340.614 T1.4 90.778,340.718 92.941,340.718 95.322,343.099 96.11,343.099 P3.1 P2.1
NetP2_2: P2.2 T1.6 | length 8.3
  Top Layer w1: T1.6@90.674,346.329 90.674,348.732 91.26,349.318 P2.2
NetP3_2: P3.2 R9.2 | length 3
  Top Layer w0.7: R9.2@98.567,341.249 R9.2
  Top Layer w1: P3.2 96.495,340.809 97.062,341.376 98.44,341.376 R9.2@98.567,341.249
NetR8_1: R8.1 U4.1 | length 2.8
  Top Layer w0.45: U4.1 75.184,361.019 R8.1
NetR9_1: R9.1 VR1.1 | length 62.8
  Top Layer w1: VR1.1 71.691,331.534 73.025,330.2 81.837,330.2 82.423,330.786 82.423,346.075 88.138,351.79 98.933,351.79 100.727,349.996 100.727,340.169 100.141,339.583 R9.1
NetR11_2: R11.2 U5.1 | length 3
  Top Layer w0.45: U5.1 86.487,363.713 R11.2@86.614,363.84
NetT2_6: T2.6 VR1.2 | length 20.7
  Top Layer w1: T2.6 70.28,345.694 70.866,345.108 70.866,338.533 71.452,337.947 76.708,337.947 78.105,336.55 78.105,334.264 VR1.2
PHONE: J4.1 SW2.1 | length 8.9
  Top Layer w1: J4.1 54.045,329.46 62.335,329.46 SW2.1@62.611,329.184
PTT: J3.2 J4.2 U3.5 | length 87.7
  Bottom Layer w1: J4.2 56.263,326.056 57.277,327.07 57.277,330.581 59.944,333.248 65.659,338.963 98.679,338.963 101.473,336.169 J3.2@101.473,325.456 ; 65.532,338.836 65.532,354.33 69.596,358.394 U3.5
RESET: C4.2 SW1.2 U1.7 | length 17.3
  Top Layer w0.45: v1(64.897,370.967) 63.93,371.934 SW1.2 63.93,373.957 65.241,375.268 C4.2 ; v1(70.612,374.396) U1.7
  Bottom Layer w0.45: v1(64.897,370.967) 64.897,372.999 66.294,374.396 v1(70.612,374.396)
RI: U1.11
RTS: D6.2 U1.14 U3.2 | length 67.4
  Top Layer w0.45: v1(70.728,366.2) 74.481,366.2 75.692,367.411 U1.14
  Bottom Layer w0.45: D6.2 49.022,367.411 47.244,365.633 42.164,365.633 41.275,364.744 41.275,356.108 44.323,353.06 61.712,353.06 61.976,353.324 61.976,357.759 62.611,358.394 U3.2 66.421,358.394 67.31,359.283 67.31,362.783 v1(70.728,366.2)
RXD: DS2.1 R12.1 U1.3 U5.4 | length 66
  Top Layer w0.254: v1(91.821,369.951) 91.821,356.489 92.456,355.854 U5.4
  Top Layer w0.45: DS2.1 66.841,380.236 67.818,379.259 67.818,374.65 69.469,372.999 74.676,372.999 75.692,374.015 U1.3 75.692,378.632 v1(76.648,379.588) ; U5.4 96.774,355.854 97.663,356.743 R12.1
  Bottom Layer w0.254: v1(88.265,378.206) 88.265,376.047 91.821,372.491 v1(91.821,369.951)
  Bottom Layer w0.45: v1(76.648,379.588) 86.883,379.588 v1(88.265,378.206)
RXD_R: P1.3 R10.1 U4.4 | length 70.6
  Top Layer w0.254: U4.4 82.678,355.812 82.678,354.972 83.446,354.203 98.552,354.203 100.584,356.235 100.584,386.842 97.394,390.032 85.471,390.032 85.344,390.159 P1.3
SPK-OUT: C5.2 J3.6 T1.1 TP6.1 | length 74.8
  Top Layer w1: T1.1@77.317,345.944 77.194,345.821 73.406,345.821 TP6.1 82.804,350.139 85.979,353.314 99.441,353.314 101.981,350.774 101.981,336.296 100.203,334.518 92.202,334.518 89.281,331.597 89.281,327.242 J3.6
TNOW: U1.15
TXD: DS1.1 R8.2 U1.2 | length 39.8
  Top Layer w0.45: DS1.1 65.501,378.59 66.411,378.59 66.675,378.327 66.675,366.383 68.03,365.028 75.169,365.028 R8.2 77.729,365.013 79.888,367.172 79.888,373.766 79.624,374.03 77.602,374.03 76.967,374.665 76.967,376.588 U1.2
TXD_R: P1.4 R11.1 | length 30
  Top Layer w0.45: P1.4 82.804,387.604 84.074,386.334 84.074,370.078 86.487,367.665 R11.1
UD_N: D3.1 J1.2 U1.6 | length 17.2
  Top Layer w0.254: D3.1@69.33,384.569 69.33,384.579 69.503,384.752 69.513,384.752 70.523,385.762 J1.2
  Top Layer w0.45: D3.1@69.33,384.569 69.33,382.915 69.594,382.651 71.618,382.651 71.882,382.387 U1.6
UD_P: D2.1 J1.3 U1.5 | length 17.6
  Top Layer w0.254: D2.1 69.342,387.362 69.342,388.153 69.873,388.684 J1.3
  Top Layer w0.45: D2.1 69.336,387.344 69.336,386.086 v1(69.342,386.08) ; U1.5 v1(73.152,378.841)
  Bottom Layer w0.45: v1(69.342,386.08) 69.342,381.381 70.485,380.238 72.888,380.238 73.152,379.974 v1(73.152,378.841)
UP: J3.4 J4.4 | length 52.4
  Top Layer w0.45: J4.4@50.927,320.005 50.927,316.367 51.191,316.103 95.875,316.103 96.139,316.367 J3.4@96.139,319.661
pads on no net: J1.4 J1.* J3.5 J4.5 J4.6 P1.1 P1.2 SW1. T1.2 T1.5 T2.2 T2.5 U1.8 U2.3 U2.6 U3.3 U3.6 U4.3 U4.6 U5.3 U5.6

## Polygon pours and split planes (outlines as drawn)
GND_R on Top Layer "Top Layer-GND_R" (solid, remove dead copper, pour order 1): 39.495,314.098 cw(c39.495,315.15) 38.443,315.15 38.443,358.394 108.46,358.394 108.458,315.101 108.462,315.15 cw(c107.41,315.15) 107.41,314.098 107.456,314.099
GND on Top Layer "Top Layer-GND" (solid, remove dead copper, pour order 0): 38.443,358.774 108.46,358.776 108.462,395.95 ccw(c107.411,395.949) 107.41,397 39.495,397 ccw(c39.495,395.948) 38.443,395.948
GND_R on Bottom Layer "Bottom Layer-GND_R" (solid, remove dead copper, pour order 3): 39.495,314.098 cw(c39.495,315.15) 38.443,315.15 38.443,395.948 cw(c39.495,395.948) 39.495,397 107.41,397 107.41,397.002 cw(c107.41,395.95) 108.462,395.95 108.458,395.95 108.458,315.101 108.462,315.15 cw(c107.41,315.15) 107.41,314.098 107.456,314.099
+5V on Bottom Layer "Bottom +5V" (solid, remove dead copper, pour order 2): 67.437,371.475 71.247,367.665 71.374,367.601 81.216,367.601 93.345,355.473 97.028,355.473 97.028,362.204 81.47,377.761 81.407,386.588 79.629,388.366 70.866,388.366 57.912,388.366 49.784,380.238 49.784,377.698 43.434,371.348 43.434,358.902 48.768,358.902 51.42,361.554 51.42,367.777 62.611,378.968 66.929,378.968 67.437,378.439

## Silkscreen, mask and mechanical layers (free items; w line width, h text height)
Mechanical 1:
  lines w0.2: 39.495,314.098 cw(c39.495,315.15) 38.443,315.15 38.443,395.948 cw(c39.495,395.948) 39.495,397 107.41,397 ; 39.494,314.099 107.456,314.099 ; 107.41,314.098 ccw(c107.41,315.15) 108.462,315.15 ; 107.41,397.002 cw(c107.41,395.95) 108.462,395.95 ; 108.458,315.101 108.458,395.95

## Text inside footprints (layer, text, board x,y; h text height)
D1: Top Overlay "*" at 74.828,382.722 h1.27 r90; Mechanical 13 "*" at 74.828,384.162 h1.27 r90